# Altium PCB Audio Board Breakout.PcbDoc
Units mil, origin at the board's own origin, x right, y up, seen from the top; angles counter-clockwise.
Board outline 1000 x 1700 mil, 2 copper layers (Top Layer, Bottom Layer); 2 components, 16 nets, 33 pads, 0 vias.
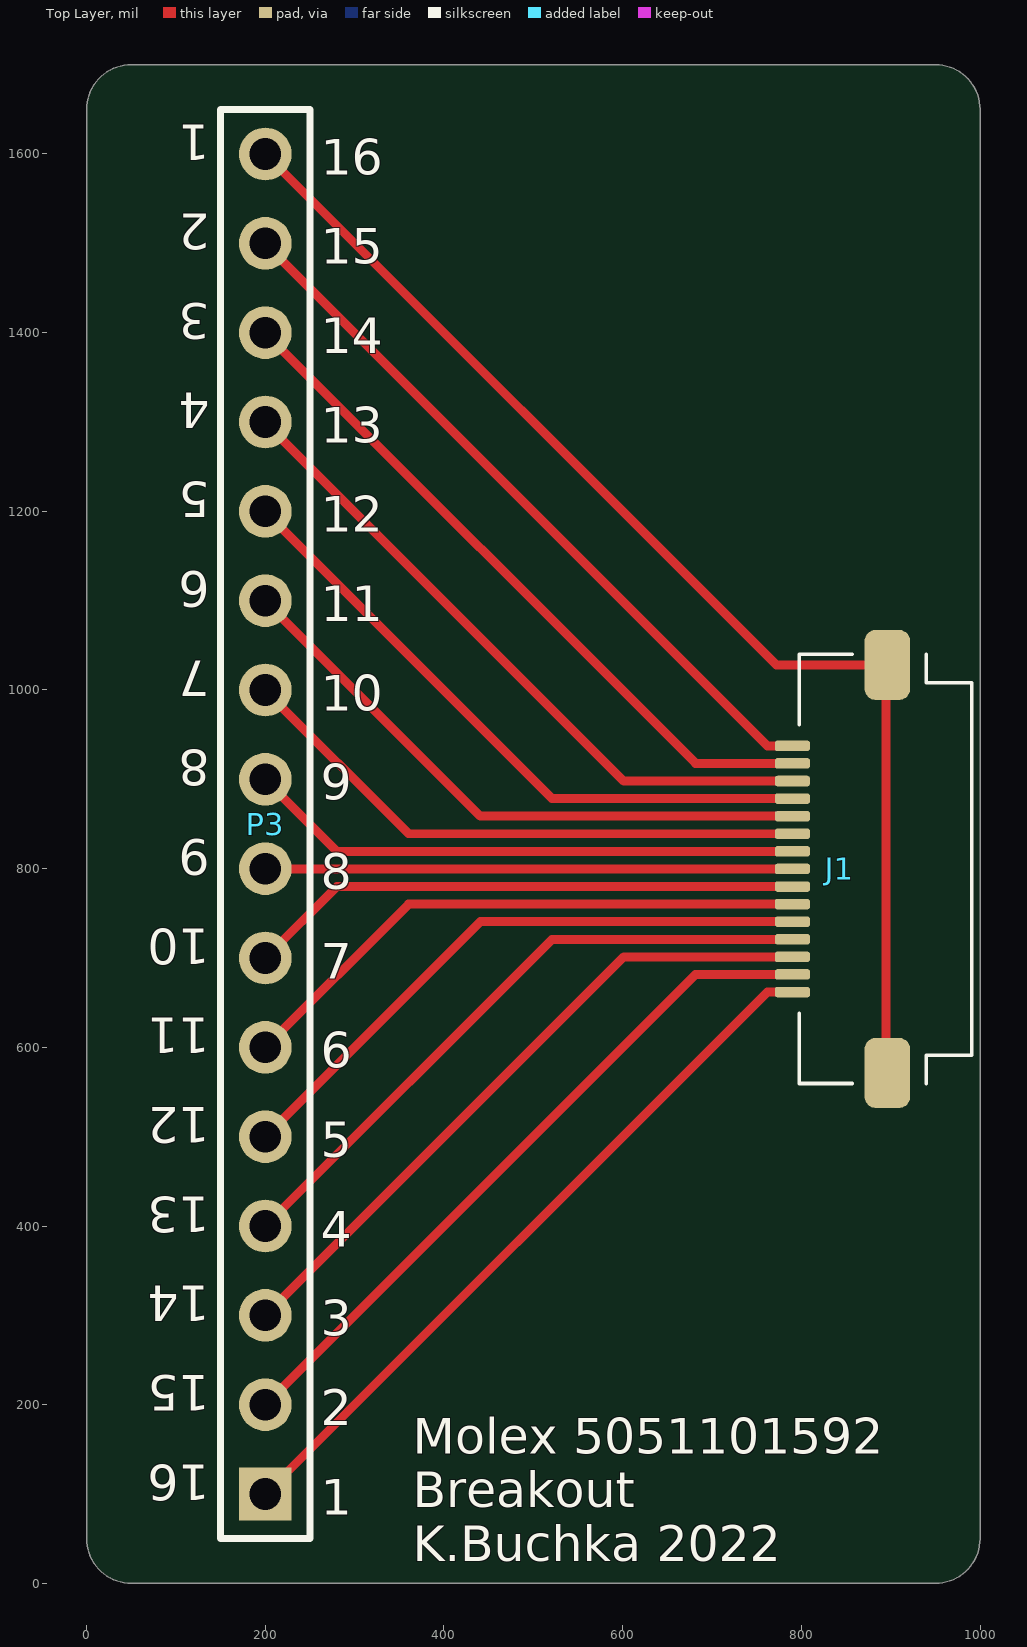
[diagram p0: Top Layer view]
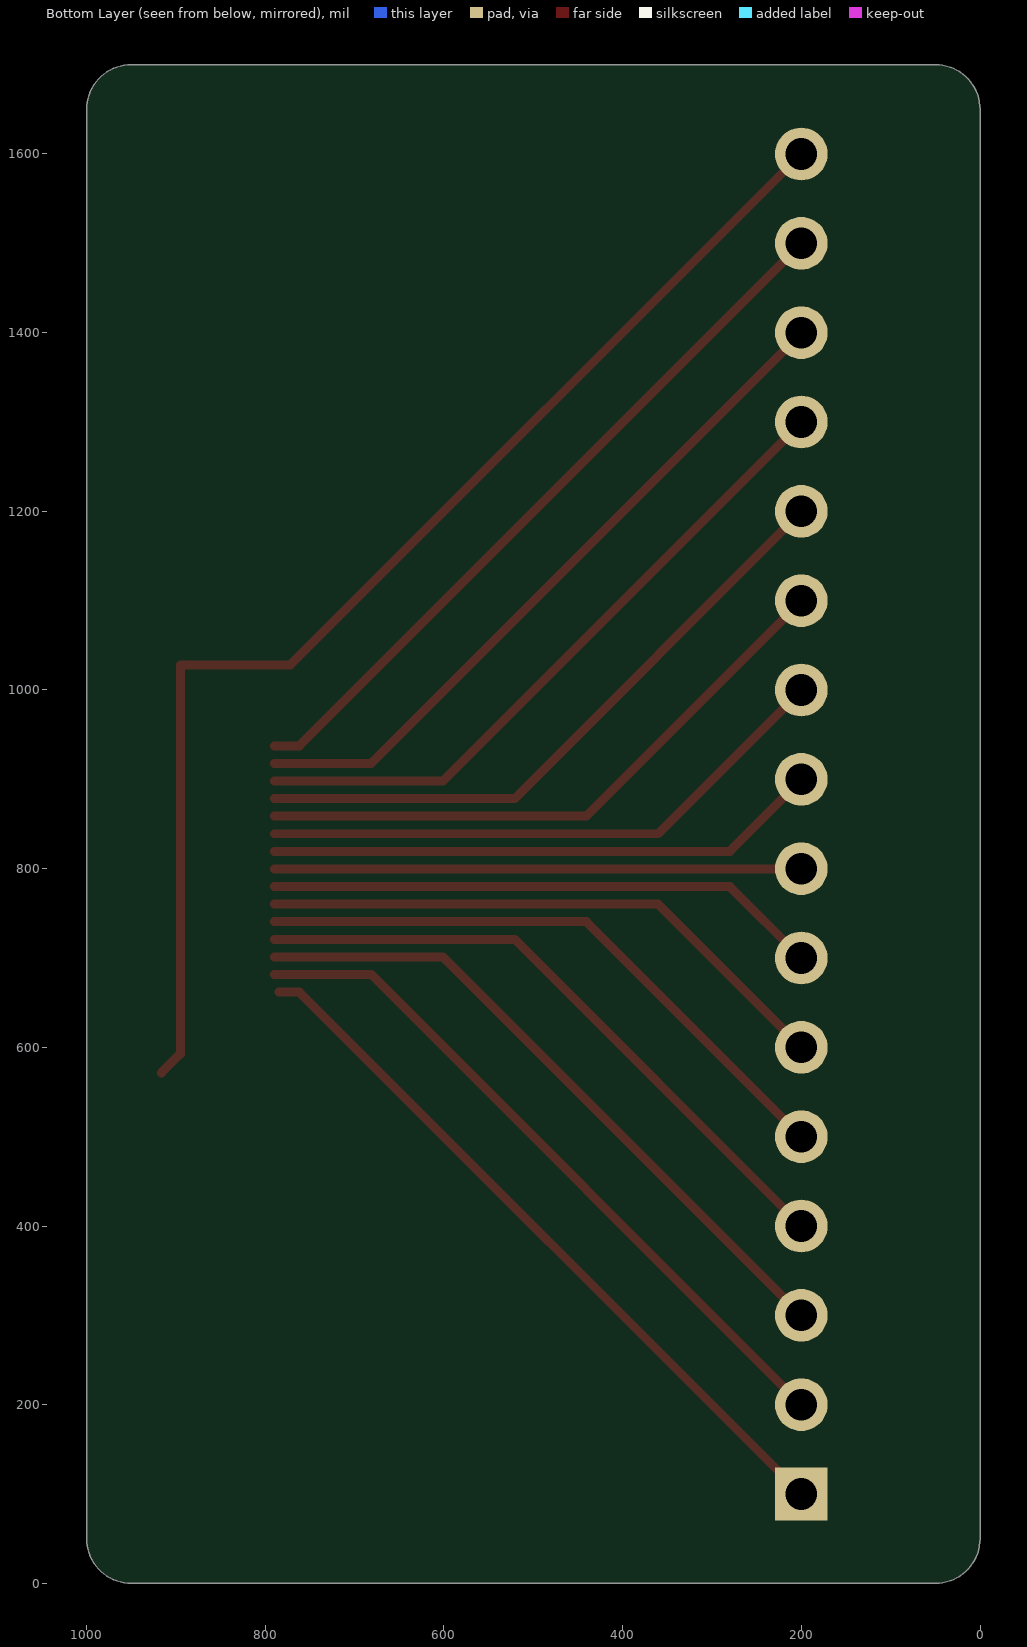
[diagram p1: Bottom Layer view, seen from below]

## Layer stack, top to bottom
Top Solder: solder mask 0.4, Solder Resist, Dk 3.5
Top Layer: signal copper 1.4
Dielectric 1: dielectric 12.6, FR-4, Dk 4.8
Bottom Layer: signal copper 1.4
Bottom Solder: solder mask 0.4, Solder Resist, Dk 3.5

## Board outline
50,0 cw(c50,50) 0,50 0,1650 cw(c50,1650) 50,1700 950,1700 cw(c950,1650) 1000,1650 1000,50 cw(c950,50) 950,0

## Design rules (kind name [scope] priority, off if disabled: settings)
Clearance [All] p1: gap=7 ignorepadtopadclearanceinfootprint=FALSE
PolygonConnect [All] p1: connectstyle=Relief reliefconductorwidth=10 reliefentries=4 polygonreliefangle="90 Angle" airgapwidth=10
RoomDefinition "Audio Board Breakout" [InComponentClass('Audio Board Breakout')] p1: confinementstyle=ConfineIn formatcopy=TRUE lockcomponents=FALSE outline -1000,-1000 6545,-1000 6545,4600 -1000,4600
RoutingVias [All] p1: holewidth=28 width=50 viastyle="Through Hole" minholewidth=28 minwidth=50 maxholewidth=28 maxwidth=50
SolderMaskExpansion [All] p1: expansion=4
Width [All] p1: maxlimit=10 minlimit=10 preferedwidth=10
30 further rules are at their usual default settings.

## Components (designator, comment, footprint, x,y, rotation, side; value= is the part's Value field where it differs from the comment)
J1 "5051101592" 5051101592 790,799.68 r90 top
P3 "Header 16" HDR1X16 200,100 r90 top

## Footprints (in the part's own frame and the unit in brackets; to place one, negate y for a bottom-side part, rotate by r counter-clockwise, add the part's x,y. Pads: shape width x height; smd on the part's side, far side on the other; paste and mask are expansions set on the pad)
5051101592 [mm] "CONN FPC BOTTOM 15POS .5MM R/A"
  rrect50% 0.3x1 smd: 1(-3.5,0) 2(-3,0) 3(-2.5,0) 4(-2,0) 5(-1.5,0) 6(-1,0) 7(-0.5,0) 8(0,0) 9(0.5,0) 10(1,0) 11(1.5,0) 12(2,0) 13(2.5,0) 14(3,0) 15(3.5,0)
  rrect50% 2x1.3 smd: 16(-5.8,-2.7) 17(5.8,-2.7)
  silkscreen extent -6.1,-5.1 6.1,-0.2
HDR1X16 [mm] "Connector; Header; 16 Position"
  rect 1.5x1.5 hole 0.9: 1(0,0)
  round 1.5 hole 0.9: 2(2.54,0) 3(5.08,0) 4(7.62,0) 5(10.16,0) 6(12.7,0) 7(15.24,0) 8(17.78,0) 9(20.32,0) 10(22.86,0) 11(25.4,0) 12(27.94,0) 13(30.48,0) 14(33.02,0) 15(35.56,0) 16(38.1,0)
  silkscreen extent -1.27,-1.27 39.37,1.27

## Part data
P3: "Header, 16-Pin", LatestRevisionDate=17-Jul-2002, LatestRevisionNote="Re-released for DXP Platform.", Publisher="Altium Limited"

## Nets (pads, with @x,y where several pads share a name; then routed paths per layer and width w, separated by ;. In a path a pad name is that pad's centre, name@x,y a point inside that pad or via, vN(x,y) a via of type N, cw(c..) or ccw(c..) an arc to the next point about the centre after c; other vN are vias at no path point)
NetJ1_1: J1.1 P3.1 | length 817.7
  Top Layer w10: P3.1 761.89,661.89 J1.1@785,661.89
NetJ1_2: J1.2 P3.2 | length 789.5
  Top Layer w10: P3.2 681.57,681.57 J1.2
NetJ1_3: J1.3 P3.3 | length 756.2
  Top Layer w10: P3.3 601.26,701.26 J1.3
NetJ1_4: J1.4 P3.4 | length 722.9
  Top Layer w10: P3.4 520.94,720.94 J1.4
NetJ1_5: J1.5 P3.5 | length 689.7
  Top Layer w10: P3.5 440.63,740.63 J1.5
NetJ1_6: J1.6 P3.6 | length 656.4
  Top Layer w10: P3.6 360.31,760.31 J1.6
NetJ1_7: J1.7 P3.7 | length 623.1
  Top Layer w10: P3.7 280,780 J1.7
NetJ1_8: J1.8 P3.8 | length 590.1
  Top Layer w10: P3.8 200.32,799.68 J1.8
NetJ1_9: J1.9 P3.9 | length 623.1
  Top Layer w10: P3.9@200,899.37 280,819.37 J1.9
NetJ1_10: J1.10 P3.10 | length 656.4
  Top Layer w10: P3.10@200,999.37 360.31,839.06 J1.10
NetJ1_11: J1.11 P3.11 | length 689.7
  Top Layer w10: P3.11@200,1099.37 440.63,858.74 J1.11
NetJ1_12: J1.12 P3.12 | length 722.9
  Top Layer w10: P3.12@200,1199.37 520.94,878.43 J1.12
NetJ1_13: J1.13 P3.13 | length 756.2
  Top Layer w10: P3.13@200,1299.37 601.26,898.11 J1.13
NetJ1_14: J1.14 P3.14 | length 789.5
  Top Layer w10: P3.14@200,1399.37 681.57,917.8 J1.14
NetJ1_15: J1.15 P3.15 | length 822.7
  Top Layer w10: P3.15@200,1499.37 761.89,937.48 J1.15
NetJ1_16: J1.16 J1.17 P3.16 | length 1397.4
  Top Layer w10: P3.16 771.97,1028.03 895,1028.03 895,592.64 J1.16@916.3,571.34

## Silkscreen, mask and mechanical layers (free items; w line width, h text height)
Top Overlay:
  text "1" at 138,1633 h40 r180
  text "16" at 262,1577 h40
  text "2" at 138,1533 h40 r180
  text "15" at 262,1477 h40
  text "3" at 138,1433 h40 r180
  text "14" at 262,1377 h40
  text "4" at 138,1333 h40 r180
  text "13" at 262,1277 h40
  text "5" at 138,1233 h40 r180
  text "12" at 262,1177 h40
  text "6" at 138,1133 h40 r180
  text "11" at 262,1077 h40
  text "7" at 138,1033 h40 r180
  text "10" at 262,977 h40
  text "8" at 138,933 h40 r180
  text "9" at 262,877 h40
  text "9" at 138,833 h40 r180
  text "8" at 262,777 h40
  text "10" at 138,733 h40 r180
  text "7" at 262,677 h40
  text "11" at 138,633 h40 r180
  text "6" at 262,577 h40
  text "12" at 138,533 h40 r180
  text "5" at 262,477 h40
  text "13" at 138,433 h40 r180
  text "4" at 262,377 h40
  text "14" at 138,333 h40 r180
  text "3" at 262,277 h40
  text "15" at 138,233 h40 r180
  text "2" at 262,177 h40
  text "16" at 138,133 h40 r180
  text "1" at 262,77 h40
  text "Molex 5051101592 / Breakout / K.Buchka 2022" at 365,25 h40
Mechanical 1:
  the board outline again, w3.94